# Altium PCB PowerBoard.PcbDoc
Units mm, origin at the board's own origin, x right, y up, seen from the top; angles counter-clockwise.
Board outline 100 x 50 mm, 2 copper layers (Top Layer, Bottom Layer), stack 1.536 mm thick; 47 components, 22 nets, 112 pads, 61 vias.
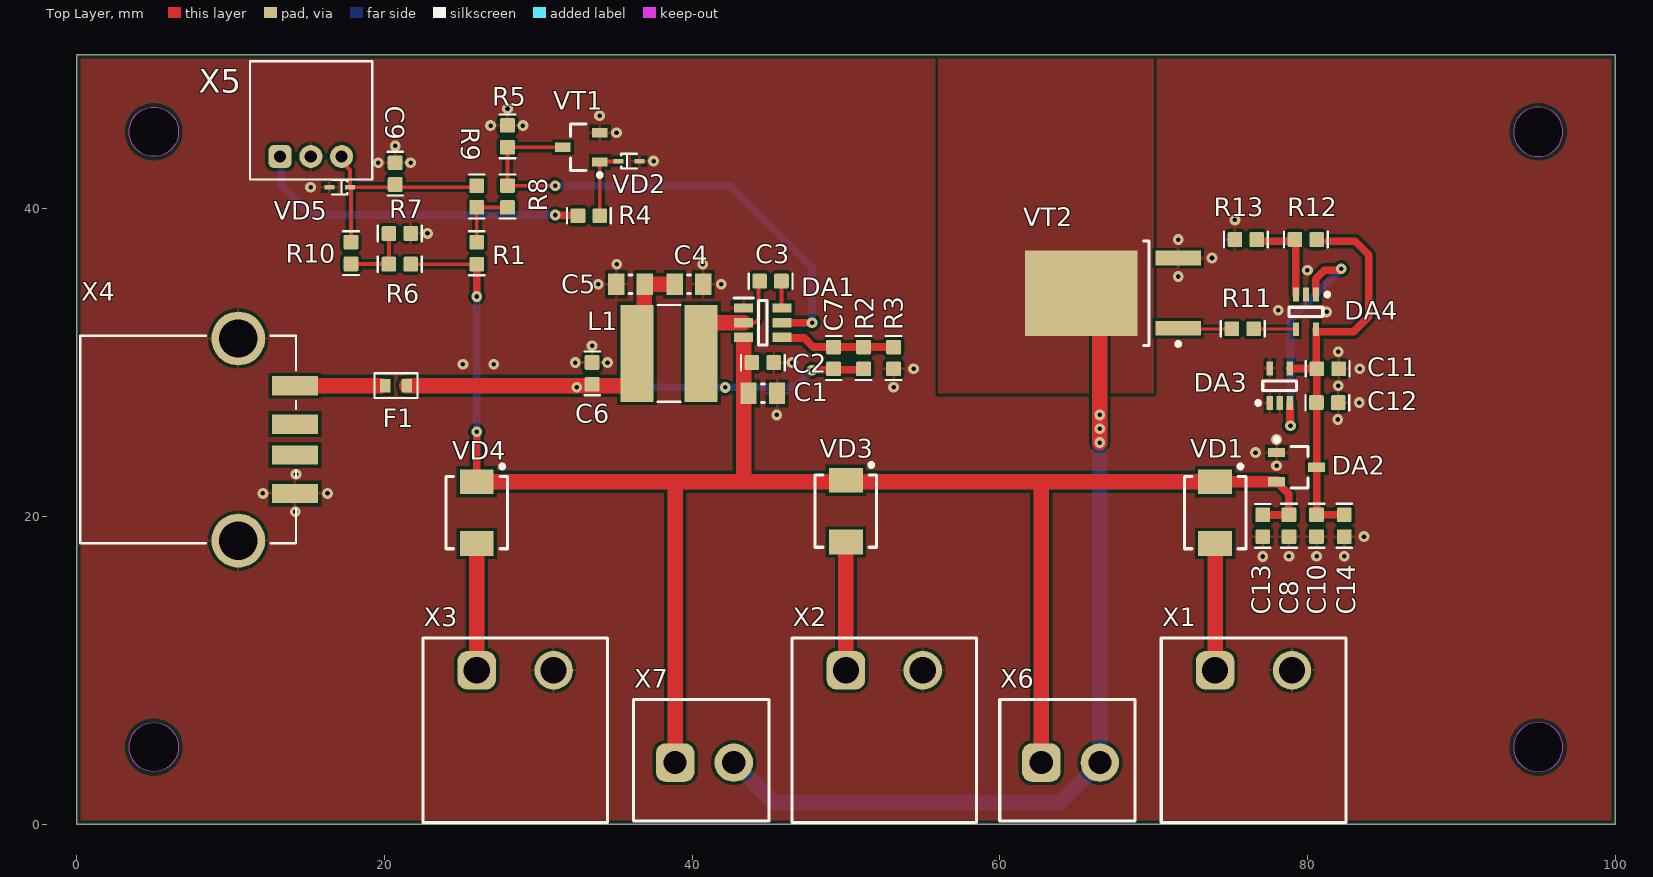
[diagram p0: Top Layer view]
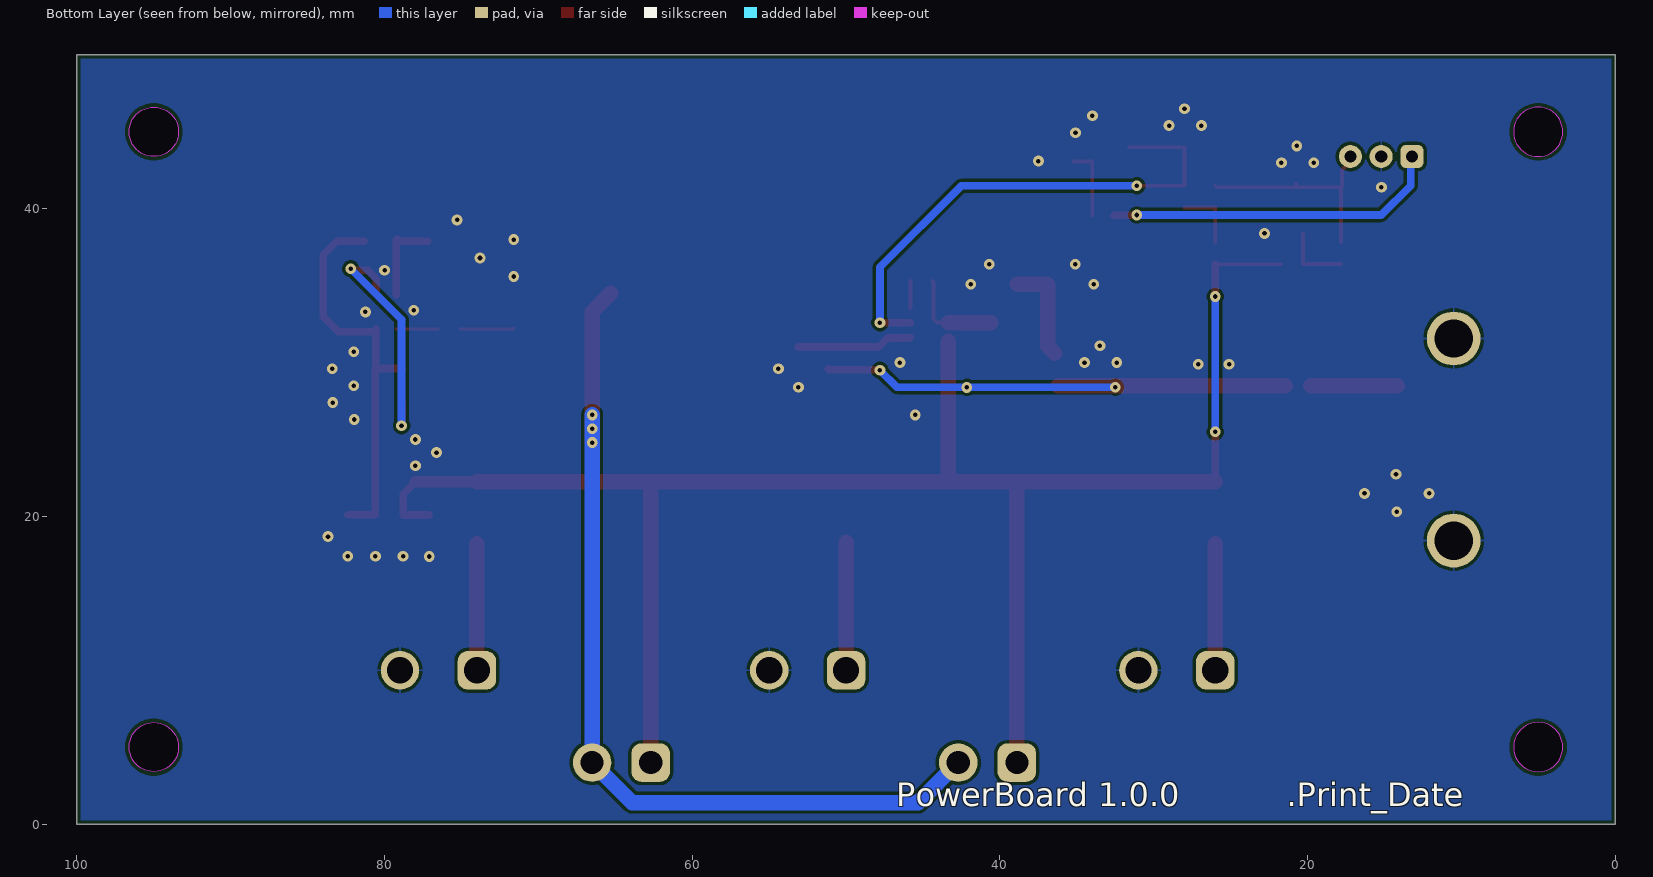
[diagram p1: Bottom Layer view, seen from below]
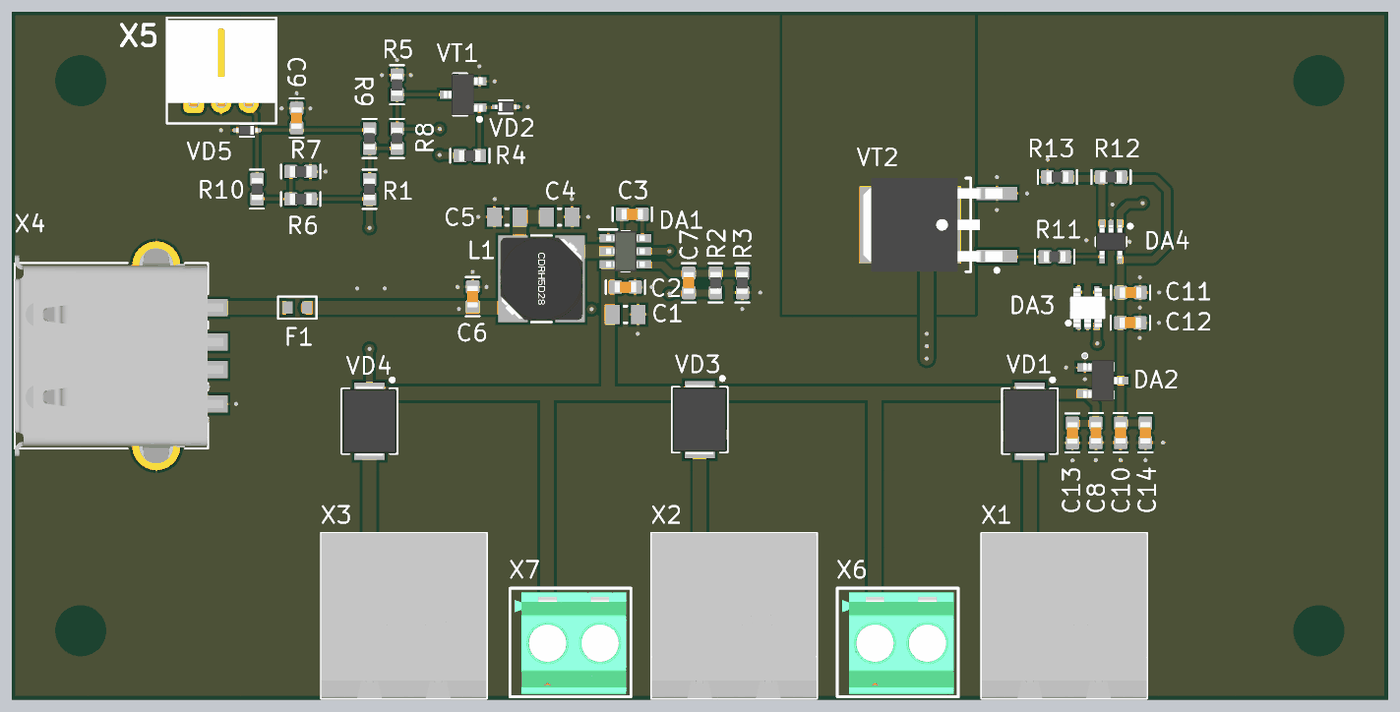
[diagram p2: 3D render of the assembled board from above, using the file's embedded part models]

## Layer stack, top to bottom
Top Solder: solder mask 0.0102, Solder Resist, Dk 3.5
Top Layer: signal copper 0.018
Dielectric 1: dielectric 1.5, FR-4, Dk 4.8
Bottom Layer: signal copper 0.018
Bottom Solder: solder mask 0.0102, Solder Resist, Dk 3.5

## Board outline
0.006,0.006 100.006,0.006 100.006,50.006 0.006,50.006
cut-out: 93.406,45.006 ccw(c95.006,45.006) 95.006,43.406 ccw(c95.006,45.006) 96.606,45.006 ccw(c95.006,45.006) 95.006,46.606 ccw(c95.006,45.006)
cut-out: 93.406,5.006 ccw(c95.006,5.006) 95.006,3.406 ccw(c95.006,5.006) 96.606,5.006 ccw(c95.006,5.006) 95.006,6.606 ccw(c95.006,5.006)
cut-out: 3.406,5.006 cw(c5.006,5.006) 5.006,6.606 cw(c5.006,5.006) 6.606,5.006 cw(c5.006,5.006) 5.006,3.406 cw(c5.006,5.006)
cut-out: 5.006,43.406 cw(c5.006,45.006) 3.406,45.006 cw(c5.006,45.006) 5.006,46.606 cw(c5.006,45.006) 6.606,45.006 cw(c5.006,45.006)

## Design rules (kind name [scope] priority, off if disabled: settings)
AcuteAngle [All] p1: minimum=3.50000000000000E+0001 checktracksonly=FALSE
BoardOutlineClearance "BoardOutlineClearance 1" [All] p1: gap=0.25 ignorepadtopadclearanceinfootprint=FALSE except(0: Arc-SplitContinuation Track-SplitContinuation SMDPad-SplitContinuation THPad-SplitContinuation Via-SplitContinuation Fill-SplitContinuation Poly-SplitContinuation Region-SplitContinuation Text-SplitContinuation) // Milling
BoardOutlineClearance "BoardOutlineClearance 2" [All] p2 off: gap=0.4 ignorepadtopadclearanceinfootprint=FALSE except(0: Arc-SplitContinuation Track-SplitContinuation SMDPad-SplitContinuation THPad-SplitContinuation Via-SplitContinuation Fill-SplitContinuation Poly-SplitContinuation Region-SplitContinuation Text-SplitContinuation) // V-Cut
Clearance "Clearance 3 Oz" [All] p1 off: gap=0.35 ignorepadtopadclearanceinfootprint=FALSE except(0.25: Arc-Hole Track-Hole SMDPad-Hole THPad-Hole Via-Hole Fill-Hole Poly-Hole Region-Hole Text-Hole)
Clearance "Clearance 2 Oz" [All] p2 off: gap=0.3 ignorepadtopadclearanceinfootprint=FALSE except(0.25: Arc-Hole Track-Hole SMDPad-Hole THPad-Hole Via-Hole Fill-Hole Poly-Hole Region-Hole Text-Hole)
Clearance "Clearance-1 1 Oz" [All] p3 off: gap=0.2 ignorepadtopadclearanceinfootprint=FALSE except(0.25: Arc-Hole Track-Hole SMDPad-Hole THPad-Hole Via-Hole Fill-Hole Poly-Hole Region-Hole Text-Hole) // Standart
Clearance "Clearance-2 1 Oz" [All] p4 off: gap=0.15 ignorepadtopadclearanceinfootprint=FALSE except(0.2: Arc-Fill Arc-Poly Track-Fill Track-Poly SMDPad-Fill SMDPad-Poly THPad-Fill THPad-Poly Via-Fill Via-Poly Fill-Fill Fill-Poly Poly-Poly; 0.25: Arc-Hole Track-Hole SMDPad-Hole THPad-Hole Via-Hole Fill-Hole Poly-Hole Region-Hole Text-Hole) // Advance
Clearance "Clearance-1 1/2 Oz" [All] p5: gap=0.125 ignorepadtopadclearanceinfootprint=FALSE except(0.2: Arc-Fill Arc-Poly Track-Fill Track-Poly SMDPad-SMDPad SMDPad-Fill SMDPad-Poly THPad-Fill THPad-Poly Via-Fill Via-Poly Fill-Fill Fill-Poly Poly-Poly Poly-Region Poly-Text; 0.25: Arc-Hole Track-Hole SMDPad-Hole THPad-Hole Via-Hole Fill-Hole Poly-Hole Region-Hole Text-Hole) // Standart
Clearance "Clearance-2 1/2 Oz" [All] p6 off: gap=0.1 ignorepadtopadclearanceinfootprint=FALSE except(0.15: Arc-Fill Arc-Poly Track-Fill Track-Poly SMDPad-SMDPad SMDPad-Fill SMDPad-Poly THPad-Fill THPad-Poly Via-Fill Via-Poly Fill-Fill Fill-Poly Poly-Poly Poly-Region Poly-Text; 0.25: Arc-Hole Track-Hole SMDPad-Hole THPad-Hole Via-Hole Fill-Hole Poly-Hole Region-Hole Text-Hole) // Advance
DiffPairsRouting "DiffPairsRouting 1 Oz" [All] p1 off: maxlimit=0.254 minlimit=0.2 mostfreqgap=0.254 toplayer_minwidth=0.2 toplayer_maxwidth=0.381 toplayer_prefwidth=0.381 bottomlayer_minwidth=0.2 bottomlayer_maxwidth=0.381 bottomlayer_prefwidth=0.381 maxuncoupledlength=12.7
DiffPairsRouting "DiffPairsRouting 1/2 Oz" [All] p2: maxlimit=0.254 minlimit=0.1 mostfreqgap=0.254 toplayer_minwidth=0.1 toplayer_maxwidth=0.381 toplayer_prefwidth=0.381 bottomlayer_minwidth=0.1 bottomlayer_maxwidth=0.381 bottomlayer_prefwidth=0.381 maxuncoupledlength=12.7
HoleSize "Minimum HoleSize" [IsPad] p1: absolutevalues=TRUE maxlimit=5.9 minlimit=0.6 maxpercent=80.000 minpercent=20.000
HoleSize "Minimum HoleSize VIA 1" [IsVia] p2: absolutevalues=TRUE maxlimit=5.9 minlimit=0.3 maxpercent=80.000 minpercent=20.000 // Standart
HoleSize "Minimum HoleSize VIA 2" [IsVia] p3 off: absolutevalues=TRUE maxlimit=5.9 minlimit=0.2 maxpercent=80.000 minpercent=20.000 // Advance
HoleToHoleClearance Hole2HoleClearance [All] p1: gap=0.25 allowstackedmicrovias=FALSE
MinimumAnnularRing "Minimum AR VIA Standart" [IsVia] p1: minimumring=0.15
MinimumAnnularRing "Minimum AR PAD Standart" [IsPAD] p2: minimumring=0.2
MinimumAnnularRing "Minimum AR VIA Advance" [IsVia] p3 off: minimumring=0.1
MinimumAnnularRing "Minimum AR PAD Advance" [IsPAD] p4 off: minimumring=0.15
MinimumSolderMaskSliver "SolderMask Bridge Standart" [All] p1: minsoldermaskwidth=0.15 // All Masks
MinimumSolderMaskSliver "SolderMask Bridge Advance" [All] p2 off: minsoldermaskwidth=0.1 // Mask LDI
PlaneClearance "PlaneClearance 3 Oz" [All] p1 off: clearance=0.35
PlaneClearance "PlaneClearance 2 Oz" [All] p2 off: clearance=0.3
PlaneClearance "PlaneClearance 1 Oz" [All] p3 off: clearance=0.2
PlaneClearance "PlaneClearance-1 1/2 Oz" [All] p4: clearance=0.2 // Standart
PlaneClearance "PlaneClearance-2 1/2 Oz" [All] p5 off: clearance=0.15 // Advance
PlaneConnect "TermalConnect 3 Oz" [All] p1 off: planeconnectstyle=Relief reliefexpansion=0.2 reliefentries=4 reliefconductorwidth=0.35 reliefairgap=0.35 // Standart
PlaneConnect "TermalConnect 2 Oz" [All] p2 off: planeconnectstyle=Relief reliefexpansion=0.2 reliefentries=4 reliefconductorwidth=0.3 reliefairgap=0.3 // Standart
PlaneConnect "TermalConnect-1 1 Oz" [All] p3 off: planeconnectstyle=Relief reliefexpansion=0.2 reliefentries=4 reliefconductorwidth=0.2 reliefairgap=0.2 // Standart
PlaneConnect "TermalConnect-2 1 Oz" [All] p4 off: pad.planeconnectstyle=Relief pad.reliefexpansion=0.15 pad.reliefentries=4 pad.reliefconductorwidth=0.2 pad.reliefairgap=0.2 via.planeconnectstyle=Direct via.reliefexpansion=0.15 via.reliefentries=4 via.reliefconductorwidth=0.15 via.reliefairgap=0.15 // Advance
PlaneConnect "TermalConnect-1 1/2 Oz" [All] p5: planeconnectstyle=Relief reliefexpansion=0.2 reliefentries=4 reliefconductorwidth=0.2 reliefairgap=0.2 // Standart
PlaneConnect "TermalConnect-2 1/2 Oz" [All] p6 off: pad.planeconnectstyle=Relief pad.reliefexpansion=0.15 pad.reliefentries=4 pad.reliefconductorwidth=0.15 pad.reliefairgap=0.15 via.planeconnectstyle=Direct via.reliefexpansion=0.15 via.reliefentries=4 via.reliefconductorwidth=0.15 via.reliefairgap=0.15 // Advance
PolygonConnect "PolygonConnect 3 Oz" [All] p1 off: thpad.connectstyle=Relief thpad.reliefconductorwidth=0.35 thpad.reliefentries=4 thpad.polygonreliefangle="90 Angle" thpad.airgapwidth=0.35 smdpad.connectstyle=Relief smdpad.reliefconductorwidth=0.35 smdpad.reliefentries=4 smdpad.polygonreliefangle="90 Angle" smdpad.airgapwidth=0.35 via.connectstyle=Direct via.reliefconductorwidth=0.254 via.reliefentries=4 via.polygonreliefangle="90 Angle" via.airgapwidth=0.254
PolygonConnect "PolygonConnect 2 Oz" [All] p2 off: thpad.connectstyle=Relief thpad.reliefconductorwidth=0.3 thpad.reliefentries=4 thpad.polygonreliefangle="90 Angle" thpad.airgapwidth=0.3 smdpad.connectstyle=Relief smdpad.reliefconductorwidth=0.3 smdpad.reliefentries=4 smdpad.polygonreliefangle="90 Angle" smdpad.airgapwidth=0.3 via.connectstyle=Direct via.reliefconductorwidth=0.254 via.reliefentries=4 via.polygonreliefangle="90 Angle" via.airgapwidth=0.254
PolygonConnect "PolygonConnect-1 1 Oz" [All] p3 off: thpad.connectstyle=Relief thpad.reliefconductorwidth=0.2 thpad.reliefentries=4 thpad.polygonreliefangle="90 Angle" thpad.airgapwidth=0.2 smdpad.connectstyle=Relief smdpad.reliefconductorwidth=0.2 smdpad.reliefentries=4 smdpad.polygonreliefangle="90 Angle" smdpad.airgapwidth=0.2 via.connectstyle=Direct via.reliefconductorwidth=0.254 via.reliefentries=4 via.polygonreliefangle="90 Angle" via.airgapwidth=0.254 // Standart
PolygonConnect "PolygonConnect-2 1 Oz" [All] p4 off: thpad.connectstyle=Relief thpad.reliefconductorwidth=0.15 thpad.reliefentries=4 thpad.polygonreliefangle="90 Angle" thpad.airgapwidth=0.15 smdpad.connectstyle=Relief smdpad.reliefconductorwidth=0.15 smdpad.reliefentries=4 smdpad.polygonreliefangle="90 Angle" smdpad.airgapwidth=0.15 via.connectstyle=Direct via.reliefconductorwidth=0.254 via.reliefentries=4 via.polygonreliefangle="90 Angle" via.airgapwidth=0.254 // Advance
PolygonConnect "PolygonConnect-1 1/2 Oz" [All] p5: thpad.connectstyle=Relief thpad.reliefconductorwidth=0.15 thpad.reliefentries=4 thpad.polygonreliefangle="90 Angle" thpad.airgapwidth=0.2 smdpad.connectstyle=Relief smdpad.reliefconductorwidth=0.2 smdpad.reliefentries=4 smdpad.polygonreliefangle="90 Angle" smdpad.airgapwidth=0.2 via.connectstyle=Direct via.reliefconductorwidth=0.254 via.reliefentries=4 via.polygonreliefangle="90 Angle" via.airgapwidth=0.254 // Standart
PolygonConnect "PolygonConnect-2 1/2 Oz" [All] p6 off: thpad.connectstyle=Relief thpad.reliefconductorwidth=0.125 thpad.reliefentries=4 thpad.polygonreliefangle="90 Angle" thpad.airgapwidth=0.15 smdpad.connectstyle=Relief smdpad.reliefconductorwidth=0.125 smdpad.reliefentries=4 smdpad.polygonreliefangle="90 Angle" smdpad.airgapwidth=0.15 via.connectstyle=Direct via.reliefconductorwidth=0.254 via.reliefentries=4 via.polygonreliefangle="90 Angle" via.airgapwidth=0.254 // Advance
RoutingCorners [All] p1 off: cornerstyle=45-Degree minsetback=2.54 maxsetback=2.54
RoutingVias [All] p1: holewidth=0.3 width=0.6 viastyle="Through Hole" minholewidth=0.2 minwidth=0.4 maxholewidth=5.9 maxwidth=6.4
SilkToSilkClearance Silk2SilkClearance [All] p1 off: silktosilkclearance=0.15
SilkToSolderMaskClearance Silk2SolderMaskClearance [IsPad] p1 off: minsilkscreentomaskgap=0.15 clearancetoexposedcopper=TRUE
SolderMaskExpansion SolderMaskExpansion-1 [All] p1: expansion=0.05 istentingtop=FALSE // Standart
SolderMaskExpansion "SolderMaskExpansion LDI" [All] p2 off: expansion=0.025 istentingtop=FALSE // Advance
UnRoutedNet [All] p1: checkbadconnections=TRUE
Width "Width 3 Oz" [All] p1 off: maxlimit=10 minlimit=0.35 preferedwidth=0.4 checkconnectedcopper=TRUE
Width "Width 2 Oz" [All] p2 off: maxlimit=10 minlimit=0.3 preferedwidth=0.35 minimp=50.000000 maximp=50.000000 favimp=50.000000 checkconnectedcopper=TRUE
Width "Width 1 Oz" [All] p3 off: maxlimit=10 minlimit=0.15 preferedwidth=0.2 checkconnectedcopper=TRUE
Width "Width 1/2 Oz" [All] p4: maxlimit=10 minlimit=0.1 preferedwidth=0.125 checkconnectedcopper=TRUE
20 further rules are at their usual default settings.

## Components (designator, comment, footprint, x,y, rotation, side; value= is the part's Value field where it differs from the comment)
C1 "4.7uF" "C0805 (2012 Metric) N" 44.6,28 r180 top
C2 "0.1uF" "C0603 (1608 Metric) N" 44.6,30 r0 top
C3 "0.1uF" "C0603 (1608 Metric) N" 45.1,35.3 r180 top
C4 "22uF" "C0805 (2012 Metric) N" 39.8,35.1 r0 top
C5 "22uF" "C0805 (2012 Metric) N" 36,35.1 r180 top
C6 "0.1uF" "C0603 (1608 Metric) N" 33.5,29.3 r270 top
C7 "68pF" "C0603 (1608 Metric) N" 49.2,30.3 r270 top
C8 "10uF" "C0603 (1608 Metric) N" 78.8,19.4 r270 top
C9 "0.1uF" "C0603 (1608 Metric) N" 20.7,42.29 r270 top
C10 "10uF" "C0603 (1608 Metric) N" 80.6,19.4 r270 top
C11 "0.1uF" "C0603 (1608 Metric) N" 81.32,29.6 r0 top
C12 "0.1uF" "C0603 (1608 Metric) N" 81.3,27.4 r0 top
C13 "0.1uF" "C0603 (1608 Metric) N" 77.1,19.39 r270 top
C14 "0.1uF" "C0603 (1608 Metric) N" 82.4,19.4 r270 top
DA1 "TPS54202DDCR" SOT95P280X110-6N 44.6,32.6 r0 top
DA2 "HT7530S" SOT23-3 79.3,23.2 r0 top
DA3 "STLM20W87F" "STLM20DD9F - duplicate" 78.2,28.5 r90 top
DA4 "RS8907XC5" SOT23-5 79.9,33.3 r270 top
F1 "1.5A" "F0603 (1608 Metric) N" 20.75,28.5 r180 top
L1 "15µH" CDRH5D28 38.5,30.6 r180 top
R1 "3.9M" "R0603 (1608 Metric) N" 26,37.11 r270 top
R2 "100k" "R0603 (1608 Metric) N" 51.15,30.3 r270 top
R3 "13.3k" "R0603 (1608 Metric) N" 53.1,30.3 r90 top
R4 "1k" "R0603 (1608 Metric) N" 33.29,39.55 r0 top
R5 "220k" "R0603 (1608 Metric) N" 28,44.71 r270 top
R6 "511k" "R0603 (1608 Metric) N" 21,36.4 r0 top
R7 "82k" "R0603 (1608 Metric) N" 21,38.4 r180 top
R8 "390k" "R0603 (1608 Metric) N" 28,40.8 r270 top
R9 "1k" "R0603 (1608 Metric) N" 26,40.8 r270 top
R10 "1k" "R0603 (1608 Metric) N" 17.823,37.123 r90 top
R11 "51" "R0603 (1608 Metric) N" 75.8,32.2 r0 top
R12 "51k" "R0603 (1608 Metric) N" 79.9,38 r0 top
R13 "100k" "R0603 (1608 Metric) N" 76,38 r0 top
VD1 "10BQ030" "DO-214AA ( SMB )" 74,20.25 r270 top
VD2 "PESD12VS1UB" SOD-523 35.9,43.1 r0 top
VD3 "10BQ030" "DO-214AA ( SMB )" 50,20.35 r270 top
VD4 "10BQ030" "DO-214AA ( SMB )" 26,20.25 r270 top
VD5 "PESD12VS1UB" SOD-523 17.09,41.4 r180 top
VT1 "WM03N32M" SOT95P245X110-3N 32.8,44 r180 top
VT2 "UMW 30N03A" TO-252 67.35,34.52 r180 top
X1 "2EDGRC-5.0-02P-14-00AH" 2EDGRC-5.0-02P-14 76.5,12.1 r90 top
X2 "2EDGRC-5.0-02P-14-00AH" 2EDGRC-5.0-02P-14 52.5,12.1 r90 top
X3 "2EDGRC-5.0-02P-14-00AH" 2EDGRC-5.0-02P-14 28.5,12.1 r90 top
X4 "1-292303-1" TE_1-292303-1 10.5,25 r270 top
X5 "S3B-PH-K-S(LF)(SN)" S3B-PH-K-S(LF)(SN) 15.215,43.4 r0 top
X6 "DG381-3.81-02P-14-00AH" DG381-3.81-02P-14-00AH 62.7,4 r90 top
X7 "DG381-3.81-02P-14-00AH" DG381-3.81-02P-14-00AH 38.9,4 r90 top

## Footprints (in the part's own frame and the unit in brackets; to place one, negate y for a bottom-side part, rotate by r counter-clockwise, add the part's x,y. Pads: shape width x height; smd on the part's side, far side on the other; paste and mask are expansions set on the pad)
2EDGRC-5.0-02P-14 [mm]
  rrect50% 2.5x2.5 hole 1.7: 1(-2.1,2.5)
  round 2.5 hole 1.7: 2(-2.1,-2.5)
  silkscreen extent -12,-6 0,6, body extent -12,-6 0,6, height 10
"C0603 (1608 Metric) N" [mm] "Capacitor, Chip; 1.60 mm L X 0.80 mm W X 0.95 mm H body"
  rrect20% 0.95x0.97 smd: 1(-0.71,0) 2(0.71,0)
  Top Layer pour cut-out: -0.2,0.5 0.2,0.5 0.2,-0.5 -0.2,-0.5
  silkscreen extent -1.43,-0.5 1.43,0.5, body extent -0.8,-0.4 0.8,0.4, height 0.95
"C0805 (2012 Metric) N" [mm] "Chip Capacitor, 2-Leads, Body 2.00x1.25mm, IPC Medium Density"
  rect 1.05x1.4 smd: 1(-0.925,0) 2(0.925,0)
  silkscreen extent -0.1,-0.6 0.1,0.6, body extent -1.05,-0.67 1.05,0.67, height 0.6
CDRH5D28 [mm]
  rect 2.15x6.3 smd: 1(-2.075,0) 2(2.075,0)
  silkscreen extent -0.75,-3.15 0.75,3.15, body extent -3,-3 3,3, height 3
DG381-3.81-02P-14-00AH [mm] "DG381-3.81-02P-14-00AH"
  rrect50% 2.5x2.5 hole 1.5: 1(0,0)
  round 2.5 hole 1.5: 2(0,-3.81)
  silkscreen extent -3.8,-6.1 4.1,2.7, body extent -3.6,-5.76 3.8,2.36, height 8.6
"DO-214AA ( SMB )" [mm]
  rect 1.6x2.2 smd: A(2.01,0) C(-2.01,0)
  silkscreen extent -3.12,-2 2.35,2, body extent -2.57,-1.97 2.57,1.97, height 2.38
"F0603 (1608 Metric) N" [mm] "Chip Resistor, 2-Leads, Body 1.60x0.80mm, IPC Medium Density"
  rect 0.7x0.9 smd: 1(-0.7,0) 2(0.7,0)
  silkscreen extent -1.4,-0.8 1.4,0.8, body extent -0.85,-0.45 0.85,0.45, height 0.4
"R0603 (1608 Metric) N" [mm] "Resistor, Chip; 1.60 mm L X 0.80 mm W X 0.95 mm H body"
  rrect20% 0.95x0.97 smd: 1(-0.71,0) 2(0.71,0)
  Top Layer pour cut-out: -0.2,0.5 0.2,0.5 0.2,-0.5 -0.2,-0.5
  silkscreen extent -1.43,-0.5 1.43,0.5, body extent -0.8,-0.4 0.8,0.4, height 0.95
S3B-PH-K-S(LF)(SN) [mm]
  rrect50% 1.5x1.5 hole 0.8: 1(-2,0)
  round 1.5 hole 0.8: 2(0,0) 3(2,0)
  silkscreen extent -3.95,-1.5 4,6.2, body extent -4,-0.25 4,6, height 4.62
SOD-523 [mm]
  rect 0.65x0.3 smd: A(0.675,0) C(-0.675,0)
  silkscreen extent -0.5,-0.48 0.5,0.48, body extent -0.8,-0.4 0.8,0.4, height 0.7
SOT23-3 [mm] "SOT23, 3-Leads, Body 2,90x2,60mm, Pitch 0,95mm, IPC Medium Density"
  rect 1.1x0.6 smd: 1(-1.3,0.95) 2(-1.3,-0.95) 3(1.3,0)
  silkscreen extent -1.42,-1.35 0.75,1.92, body extent -1.42,-1.5 1.42,1.5, height 1.3
SOT23-5 [mm] "SOT23, 5-Leads, Body 2,00x2,10mm, Pitch 0,65mm, IPC Medium Density"
  rect 0.9x0.4 smd: 1(-1.125,0.65) 2(-1.125,0) 3(-1.125,-0.65) 4(1.125,-0.65) 5(1.125,0.65)
  silkscreen extent -1.25,-1.1 0.3,1.53, body extent -1.2,-1.1 1.2,1.1, height 1
SOT95P245X110-3N [mm] "SOT23, 3-Leads, Body 2,90x2,45mm, Pitch 0,95mm, IPC Medium Density"
  rect 1x0.6 smd: D(1.2,0) G(-1.2,0.95) S(-1.2,-0.95)
  silkscreen extent -1.33,-1.5 0.7,1.92, body extent -1.42,-1.5 1.42,1.5, height 1.2
SOT95P280X110-6N [mm]
  rect 1.25x0.6 smd: 1(-1.25,0.95) 2(-1.25,0) 3(-1.25,-0.95) 4(1.25,-0.95) 5(1.25,0) 6(1.25,0.95)
  silkscreen extent -1.88,-1.45 0.28,1.6, body extent -1.4,-1.45 1.4,1.45, height 1.1
"STLM20DD9F - duplicate" [mm] "SOT23, 5-Leads, Body 2,00x2,10mm, Pitch 0,65mm, IPC Medium Density"
  rect 0.9x0.4 smd: 1(-1.125,0.65) 2(-1.125,0) 3(-1.125,-0.65) 4(1.125,-0.65) 5(1.125,0.65)
  silkscreen extent -1.25,-1.1 0.3,1.52, body extent -1.42,-1.3 1.42,1.3, height 1.2
TE_1-292303-1 [mm]
  round 3.5 hole 2.5: 0(-6.57,0) 0(6.57,0)
  rect 1.25x3 smd: 1(-3.5,3.68) 2(-1,3.68) 3(1,3.68) 4(3.5,3.68)
  silkscreen extent -6.75,-10.28 6.75,3.75, body extent -8.12,-10.28 8.12,4.88, height 7.77
TO-252 [mm] "D-PAK, 3-Pads, Body 6,25x6,76mm (max), IPC Medium Density"
  rect 7.3x5.55 smd: D(2.05,0)
  rect 2.95x0.95 smd: G(-4.25,2.28) S(-4.25,-2.28)
  silkscreen extent -4.38,-3.4 -2,3.43, body extent -4.65,-3.4 5.45,3.4, height 2.9

## Part data
C1: library part CL21A475KBQNNNE, "CAP CER 4.7UF 50V X5R 0805", Manufacturer="Samsung Electro-Mechanics", Operating Temperature="-55°C ~ 85°C", Package / Case="0805 (2012 Metric)", Ratings=-, Supplier Part Number 1=1276-1248-1-ND, Temperature Coefficient=X5R, Tolerance=±10%, Voltage - Rated=50V, @ qty=0, Applications="General Purpose", ComponentLink1Description=Datasheet, ComponentLink1URL=http://www.samsungsem.com/kr/support/product-search/mlcc/CL21A475KBQNNNE.jsp, Factory Stock=0, Failure Rate=-, Features=-, Height - Seated (Max)=-, Image=//media.digikey.com/Renders/Samsung%20Electro-Mechanics%20America/0805-(1.40)-CL-Series.jpg, Lead Spacing=-, Lead Style=-, Minimum Quantity=2000, Mounting Type="Surface Mount, MLCC", Packaging="Tape & Reel (TR)", Part Number=CL21A475KBQNNNE, Part Status=Active, Part Type=Capacitor, Points=2, Quantity Available=20000, Series=CL, Size / Dimension="0.079\" L x 0.049\" W (2.00mm x 1.25mm)", Supplier 1=Digikey, Thickness (Max)="0.055\" (1.40mm)", Unit Price (USD)=0.12360
C2 C3 C6 C9 C12: library part CL10B104KB8NNNC, "CAP CER 0.1UF 50V X7R 0603", Manufacturer="Samsung Electro-Mechanics", Operating Temperature="-55°C ~ 125°C", Package / Case="0603 (1608 Metric)", Ratings=-, Supplier Part Number 1=1276-1000-1-ND, Temperature Coefficient=X7R, Tolerance=±10%, Voltage - Rated=50V, @ qty=0, Applications="General Purpose", ComponentLink1Description=Datasheet, ComponentLink1URL=http://www.samsungsem.com/kr/support/product-search/mlcc/CL10B104KB8NNNC.jsp, Factory Stock=0, Failure Rate=-, Features=-, Height - Seated (Max)=-, Image=//media.digikey.com/Renders/Samsung%20Electro-Mechanics%20America/CL%20Series%200603(1608%20Metric)%2010.jpg, Lead Spacing=-, Lead Style=-, Minimum Quantity=4000, Mounting Type="Surface Mount, MLCC", Packaging="Tape & Reel (TR)", Part Number=CL10B104KB8NNNC, Part Status=Active, Part Type=Capacitor, Points=2, Quantity Available=0, Series=CL, Size / Dimension="0.063\" L x 0.032\" W (1.60mm x 0.80mm)", Supplier 1=Digikey, Thickness (Max)="0.035\" (0.90mm)", Unit Price (USD)=0.00627
C4 C5: library part CC0805MKX5R6BB226, "CAP CER 22UF 10V X5R 0805", Manufacturer=Yageo, Operating Temperature="-55°C ~ 85°C", Package / Case="0805 (2012 Metric)", Ratings=-, Supplier Part Number 1=311-1900-1-ND, Temperature Coefficient=X5R, Tolerance=±20%, Voltage - Rated=10V, @ qty=0, Applications="General Purpose", ComponentLink1Description=Datasheet, ComponentLink1URL=http://www.yageo.com/documents/recent/UPY-GPHC_X5R_4V-to-50V_25.pdf, Factory Stock=0, Failure Rate=-, Features=-, Height - Seated (Max)=-, Image=//media.digikey.com/Renders/Yageo%20Renders/0805%288%5E5mm%20thickness%29.jpg, Lead Spacing=-, Lead Style=-, Minimum Quantity=0, Mounting Type="Surface Mount, MLCC", Packaging="Tape & Reel (TR)", Part Number=CC0805MKX5R6BB226, Part Status=Active, Part Type=Capacitor, Points=2, Quantity Available=0, Series=CC, Size / Dimension="0.079\" L x 0.049\" W (2.00mm x 1.25mm)", Supplier 1=Digikey, Thickness (Max)="0.057\" (1.45mm)", Unit Price (USD)=Active
C7: library part CC0603JRNPO9BN680, "CAP CER 68PF 50V C0G/NPO 0603", Manufacturer=Yageo, Operating Temperature="-55°C ~ 125°C", Package / Case="0603 (1608 Metric)", Ratings=-, Supplier Part Number 1=311-1067-1-ND, Temperature Coefficient="C0G, NP0", Tolerance=±5%, Voltage - Rated=50V, @ qty=0, Applications="General Purpose", ComponentLink1Description=Datasheet, ComponentLink1URL=http://www.yageo.com/documents/recent/UPY-GP_NP0_16V-to-50V_16.pdf, Factory Stock=0, Failure Rate=-, Features=-, Height - Seated (Max)=-, Image=//media.digikey.com/Renders/Yageo%20Renders/0603%289mmthickness%29.jpg, Lead Spacing=-, Lead Style=-, Minimum Quantity=4000, Mounting Type="Surface Mount, MLCC", Packaging="Tape & Reel (TR)", Part Number=CC0603JRNPO9BN680, Part Status=Active, Part Type=Capacitor, Points=2, Quantity Available=40000, Series=CC, Size / Dimension="0.063\" L x 0.032\" W (1.60mm x 0.80mm)", Supplier 1=Digikey, Thickness (Max)="0.035\" (0.90mm)", Unit Price (USD)=0.01379
C8 C10: library part CC0603JRNPO9BN680, "CAP CER 10uF 6.3V C0G/NPO 0603", Manufacturer=Yageo, Operating Temperature="-55°C ~ 125°C", Package / Case="0603 (1608 Metric)", Part Number=CC0603MRX6S5BB106, Ratings=-, Supplier Part Number 1=311-1067-1-ND, Temperature Coefficient="C0G, NP0", Tolerance=±5%, Voltage - Rated=50V, @ qty=0, Applications="General Purpose", ComponentLink1Description=Datasheet, ComponentLink1URL=http://www.yageo.com/documents/recent/UPY-GP_NP0_16V-to-50V_16.pdf, Factory Stock=0, Failure Rate=-, Features=-, Height - Seated (Max)=-, Image=//media.digikey.com/Renders/Yageo%20Renders/0603%289mmthickness%29.jpg, Lead Spacing=-, Lead Style=-, Minimum Quantity=4000, Mounting Type="Surface Mount, MLCC", Packaging="Tape & Reel (TR)", Part Status=Active, Part Type=Capacitor, Points=2, Quantity Available=40000, Series=CC, Size / Dimension="0.063\" L x 0.032\" W (1.60mm x 0.80mm)", Supplier 1=Digikey, Thickness (Max)="0.035\" (0.90mm)", Unit Price (USD)=0.01379
C11 C13 C14: library part CC0603JRNPO9BN680, "CAP CER 0.1uF 50V C0G/NPO 0603", Manufacturer=Yageo, Operating Temperature="-55°C ~ 125°C", Package / Case="0603 (1608 Metric)", Part Number=CC0603JRX7R9BB104, Ratings=-, Supplier Part Number 1=311-1067-1-ND, Temperature Coefficient="C0G, NP0", Tolerance=±5%, Voltage - Rated=50V, @ qty=0, Applications="General Purpose", ComponentLink1Description=Datasheet, ComponentLink1URL=http://www.yageo.com/documents/recent/UPY-GP_NP0_16V-to-50V_16.pdf, Factory Stock=0, Failure Rate=-, Features=-, Height - Seated (Max)=-, Image=//media.digikey.com/Renders/Yageo%20Renders/0603%289mmthickness%29.jpg, Lead Spacing=-, Lead Style=-, Minimum Quantity=4000, Mounting Type="Surface Mount, MLCC", Packaging="Tape & Reel (TR)", Part Status=Active, Part Type=Capacitor, Points=2, Quantity Available=40000, Series=CC, Size / Dimension="0.063\" L x 0.032\" W (1.60mm x 0.80mm)", Supplier 1=Digikey, Thickness (Max)="0.035\" (0.90mm)", Unit Price (USD)=0.01379
DA1: library part TPS54202, "Power Supply", Manufacturer_Name="Texas Instruments", Mouser Part Number=595-TPS54202DDCR, Arrow Part Number=TPS54202DDCR, Arrow Price/Stock=https://www.arrow.com/en/products/tps54202ddcr/texas-instruments?region=nac, ComponentLink1Description=Datasheet, ComponentLink1URL=https://static.chipdip.ru/lib/513/DOC010513657.pdf, Datasheet Link=http://www.ti.com/lit/gpn/tps54202, Height=1.1mm, Mouser Price/Stock=https://www.mouser.co.uk/ProductDetail/Texas-Instruments/TPS54202DDCR?qs=uP22XH7NdCsJtN%2Fq54jCtQ%3D%3D, Part Number=TPS54202DDCR
DA2: library part "UMW HT7530S", "Power Supply", Part Number=HT7530S
DA3: library part STLM20DD9F, "Ultra-low current 2.4 V precision analog temperature sensor", ComponentLink1Description=https://www.compel.ru/item-pdf/a7e49e4dedba0033f1ae17c65d4c1409/pn/st~stlm20dd9f.pdf, ComponentLink1URL=https://www.compel.ru/item-pdf/a7e49e4dedba0033f1ae17c65d4c1409/pn/st~stlm20dd9f.pdf, Part Number=STLM20W87F
DA4: "Nano-Power, CMOS Input, RRIO, / Push-Pull Output Comparator", ComponentLink1Description=https://data.electronshik.ru/z/Datasheet/R/RS8907.pdf, ComponentLink1URL=https://data.electronshik.ru/z/Datasheet/R/RS8907.pdf, Part Number=RS8907XC5
F1: library part 0603L075SLYR, "PTC RESET FUSE 6V 750MA 0603", Current - Hold (Ih) (Max)=750mA, Current - Max=50A, Manufacturer="Littelfuse Inc.", Operating Temperature="-40°C ~ 85°C", Package / Case="0603 (1608 Metric), Concave", Ratings=-, Resistance - Initial (Ri) (Min)="20 mOhms", Resistance - Post Trip (R1) (Max)="165 mOhms", Supplier Part Number 1=F5777CT-ND, Voltage - Max=6V, @ qty=0, ComponentLink1Description=Datasheet, ComponentLink1URL=http://www.littelfuse.com/~/media/electronics/datasheets/resettable_ptcs/littelfuse_ptc_lorho_datasheet.pdf.pdf, Current - Trip (It)=1.5A, Factory Stock=0, Height - Seated (Max)=-, Image=//media.digikey.com/Renders/Littelfuse%20Renders/Poly-Fuse%200603%20(1608%20Metric)%20Concave.jpg, Lead Spacing=-, Minimum Quantity=1, Mounting Type="Surface Mount", Packaging="Cut Tape (CT)", Part Number=0603L075SLYR, Part Status=Active, Quantity Available=15808, Resistance - 25°C (Typ)=-, Series="POLY-FUSE®, LoRho", Size / Dimension="0.063\" L x 0.032\" W (1.60mm x 0.80mm)", Supplier 1=Digikey, Thickness (Max)="0.030\" (0.75mm)", Time to Trip=200ms, Type=Polymeric, Unit Price (USD)=1.91000
L1: library part CDRH5D28NP-150NC, "FIXED IND 15UH 1.1A 103 MOHM SMD", Current - Saturation=-, Current Rating=1.1A, DC Resistance (DCR)="103 mOhm Max", Frequency - Test=100kHz, Manufacturer="Sumida America Components Inc.", Operating Temperature="-40°C ~ 100°C", Package / Case=Nonstandard, Supplier Part Number 1=308-2195-2-ND, Tolerance=±30%, ComponentLink1Description=Datasheet, ComponentLink1URL=http://products.sumida.com/products/pdf/CDRH5D28.pdf, Frequency - Self Resonant=-, Height - Seated (Max)="0.118\" (3.00mm)", Image=//media.digikey.com/photos/Sumida%20Photos/CDRH5D%20SERIES.jpg, Material - Core=Ferrite, Mounting Type="Surface Mount", Part Number=CDRH5D28NP-150NC, Part Status=Active, Points=2, Q @ Freq=-, Ratings=-, Shielding=Shielded, Size / Dimension="0.224\" L x 0.224\" W (5.70mm x 5.70mm)", Supplier Device Package=-, Type=-, Unit Price (USD)=0.28900
R1: library part RC0603FR-07511KL, "RES SMD 511K OHM 1% 1/10W 0603", Manufacturer=Yageo, Operating Temperature="-55°C ~ 155°C", Package / Case="0603 (1608 Metric)", Part Number=RC0603FR-073M9L, Power (Watts)="0.1W, 1/10W", Supplier Device Package=0603, Supplier Part Number 1=311-511KHRCT-ND, Temperature Coefficient=±100ppm/°C, Tolerance=±1%, ValueGOST=511кОм, ComponentLink1Description=Datasheet, ComponentLink1URL=http://www.yageo.com/documents/recent/PYu-RC_Grou, Composition="Thick Film", Features="Moisture Resistant", Height - Seated (Max)="0.022\" (0.55mm)", Image=//media.digikey.com/Renders/Yageo%20Renders/0603-(1608-Metric).jpg, Part Status=Active, Part Type=Resistor, Points=2, Series=RC, Size / Dimension="0.063\" L x 0.031\" W (1.60mm x 0.80mm)", Supplier 1=Digikey, Unit Price (USD)=0.10000
R2 R13: library part RC0603FR-07100KL, "RES SMD 100K OHM 1% 1/10W 0603", Manufacturer=Yageo, Operating Temperature="-55°C ~ 155°C", Package / Case="0603 (1608 Metric)", Power (Watts)="0.1W, 1/10W", Supplier Device Package=0603, Supplier Part Number 1=311-100KHRCT-ND, Temperature Coefficient=±100ppm/°C, Tolerance=±1%, ValueGOST=100кОм, ComponentLink1Description=Datasheet, ComponentLink1URL=http://www.yageo.com/documents/recent/PYu-RC_Grou, Composition="Thick Film", Features="Moisture Resistant", Height - Seated (Max)="0.022\" (0.55mm)", Image=//media.digikey.com/Renders/Yageo%20Renders/0603-(1608-Metric).jpg, Part Number=RC0603FR-07100KL, Part Status=Active, Part Type=Resistor, Points=2, Series=RC, Size / Dimension="0.063\" L x 0.031\" W (1.60mm x 0.80mm)", Supplier 1=Digikey, Unit Price (USD)=0.10000
R3: library part RC0603FR-0713K3L, "RES SMD 13.3K OHM 1% 1/10W 0603", Manufacturer=Yageo, Operating Temperature="-55°C ~ 155°C", Package / Case="0603 (1608 Metric)", Power (Watts)="0.1W, 1/10W", Supplier Device Package=0603, Supplier Part Number 1=311-13.3KHRCT-ND, Temperature Coefficient=±100ppm/°C, Tolerance=±1%, ValueGOST=13.3кОм, ComponentLink1Description=Datasheet, ComponentLink1URL=http://www.yageo.com/documents/recent/PYu-RC_Grou, Composition="Thick Film", Features="Moisture Resistant", Height - Seated (Max)="0.022\" (0.55mm)", Image=//media.digikey.com/Renders/Yageo%20Renders/0603-(1608-Metric).jpg, Part Number=RC0603FR-0713K3L, Part Status=Active, Part Type=Resistor, Points=2, Series=RC, Size / Dimension="0.063\" L x 0.031\" W (1.60mm x 0.80mm)", Supplier 1=Digikey, Unit Price (USD)=0.10000
R4 R9 R10: library part RC0603FR-071KL, "RES SMD 1K OHM 1% 1/10W 0603", Manufacturer=Yageo, Operating Temperature="-55°C ~ 155°C", Package / Case="0603 (1608 Metric)", Power (Watts)="0.1W, 1/10W", Supplier Device Package=0603, Supplier Part Number 1=311-1.00KHRCT-ND, Temperature Coefficient=±100ppm/°C, Tolerance=±1%, ValueGOST=1кОм, ComponentLink1Description=Datasheet, ComponentLink1URL=http://www.yageo.com/documents/recent/PYu-RC_Grou, Composition="Thick Film", Features="Moisture Resistant", Height - Seated (Max)="0.022\" (0.55mm)", Image=//media.digikey.com/Renders/Yageo%20Renders/0603-(1608-Metric).jpg, Part Number=RC0603FR-071KL, Part Status=Active, Part Type=Resistor, Points=2, Series=RC, Size / Dimension="0.063\" L x 0.031\" W (1.60mm x 0.80mm)", Supplier 1=Digikey, Unit Price (USD)=0.10000
R5: library part RC0603FR-07100KL, "RES SMD 100K OHM 1% 1/10W 0603", Manufacturer=Yageo, Operating Temperature="-55°C ~ 155°C", Package / Case="0603 (1608 Metric)", Part Number=RC0603FR-07220KL, Power (Watts)="0.1W, 1/10W", Supplier Device Package=0603, Supplier Part Number 1=311-100KHRCT-ND, Temperature Coefficient=±100ppm/°C, Tolerance=±1%, ValueGOST=100кОм, ComponentLink1Description=Datasheet, ComponentLink1URL=http://www.yageo.com/documents/recent/PYu-RC_Grou, Composition="Thick Film", Features="Moisture Resistant", Height - Seated (Max)="0.022\" (0.55mm)", Image=//media.digikey.com/Renders/Yageo%20Renders/0603-(1608-Metric).jpg, Part Status=Active, Part Type=Resistor, Points=2, Series=RC, Size / Dimension="0.063\" L x 0.031\" W (1.60mm x 0.80mm)", Supplier 1=Digikey, Unit Price (USD)=0.10000
R6: library part RC0603FR-07511KL, "RES SMD 511K OHM 1% 1/10W 0603", Manufacturer=Yageo, Operating Temperature="-55°C ~ 155°C", Package / Case="0603 (1608 Metric)", Power (Watts)="0.1W, 1/10W", Supplier Device Package=0603, Supplier Part Number 1=311-511KHRCT-ND, Temperature Coefficient=±100ppm/°C, Tolerance=±1%, ValueGOST=511кОм, ComponentLink1Description=Datasheet, ComponentLink1URL=http://www.yageo.com/documents/recent/PYu-RC_Grou, Composition="Thick Film", Features="Moisture Resistant", Height - Seated (Max)="0.022\" (0.55mm)", Image=//media.digikey.com/Renders/Yageo%20Renders/0603-(1608-Metric).jpg, Part Number=RC0603FR-07511KL, Part Status=Active, Part Type=Resistor, Points=2, Series=RC, Size / Dimension="0.063\" L x 0.031\" W (1.60mm x 0.80mm)", Supplier 1=Digikey, Unit Price (USD)=0.10000
R7: library part RC0603FR-07100KL, "RES SMD 100K OHM 1% 1/10W 0603", Manufacturer=Yageo, Operating Temperature="-55°C ~ 155°C", Package / Case="0603 (1608 Metric)", Part Number=RC0603FR-0782KL, Power (Watts)="0.1W, 1/10W", Supplier Device Package=0603, Supplier Part Number 1=311-100KHRCT-ND, Temperature Coefficient=±100ppm/°C, Tolerance=±1%, ValueGOST=100кОм, ComponentLink1Description=Datasheet, ComponentLink1URL=http://www.yageo.com/documents/recent/PYu-RC_Grou, Composition="Thick Film", Features="Moisture Resistant", Height - Seated (Max)="0.022\" (0.55mm)", Image=//media.digikey.com/Renders/Yageo%20Renders/0603-(1608-Metric).jpg, Part Status=Active, Part Type=Resistor, Points=2, Series=RC, Size / Dimension="0.063\" L x 0.031\" W (1.60mm x 0.80mm)", Supplier 1=Digikey, Unit Price (USD)=0.10000
R8: library part RC0603FR-07100KL, "RES SMD 100K OHM 1% 1/10W 0603", Manufacturer=Yageo, Operating Temperature="-55°C ~ 155°C", Package / Case="0603 (1608 Metric)", Part Number=RC0603FR-07390KL, Power (Watts)="0.1W, 1/10W", Supplier Device Package=0603, Supplier Part Number 1=311-100KHRCT-ND, Temperature Coefficient=±100ppm/°C, Tolerance=±1%, ValueGOST=100кОм, ComponentLink1Description=Datasheet, ComponentLink1URL=http://www.yageo.com/documents/recent/PYu-RC_Grou, Composition="Thick Film", Features="Moisture Resistant", Height - Seated (Max)="0.022\" (0.55mm)", Image=//media.digikey.com/Renders/Yageo%20Renders/0603-(1608-Metric).jpg, Part Status=Active, Part Type=Resistor, Points=2, Series=RC, Size / Dimension="0.063\" L x 0.031\" W (1.60mm x 0.80mm)", Supplier 1=Digikey, Unit Price (USD)=0.10000
R11: library part RC0603FR-0751RL, "RES SMD 51 OHM 1% 1/10W 0603", Manufacturer=Yageo, Operating Temperature="-55°C ~ 155°C", Package / Case="0603 (1608 Metric)", Power (Watts)="0.1W, 1/10W", Supplier Device Package=0603, Supplier Part Number 1=311-51.0HRCT-ND, Temperature Coefficient=±100ppm/°C, Tolerance=±1%, ComponentLink1Description=Datasheet, ComponentLink1URL=http://www.yageo.com/documents/recent/PYu-RC_Grou, Composition="Thick Film", Features="Moisture Resistant", Height - Seated (Max)="0.022\" (0.55mm)", Image=//media.digikey.com/Renders/Yageo%20Renders/0603-(1608-Metric).jpg, Part Number=RC0603FR-0751RL, Part Status=Active, Part Type=Resistor, Points=2, Series=RC, Size / Dimension="0.063\" L x 0.031\" W (1.60mm x 0.80mm)", Supplier 1=Digikey, Unit Price (USD)=0.10000, ValueGOST=51
R12: library part RC0603FR-071KL, "RES SMD 1K OHM 1% 1/10W 0603", Manufacturer=Yageo, Operating Temperature="-55°C ~ 155°C", Package / Case="0603 (1608 Metric)", Part Number=RC0603FR-0751KL, Power (Watts)="0.1W, 1/10W", Supplier Device Package=0603, Supplier Part Number 1=311-1.00KHRCT-ND, Temperature Coefficient=±100ppm/°C, Tolerance=±1%, ValueGOST=1кОм, ComponentLink1Description=Datasheet, ComponentLink1URL=http://www.yageo.com/documents/recent/PYu-RC_Grou, Composition="Thick Film", Features="Moisture Resistant", Height - Seated (Max)="0.022\" (0.55mm)", Image=//media.digikey.com/Renders/Yageo%20Renders/0603-(1608-Metric).jpg, Part Status=Active, Part Type=Resistor, Points=2, Series=RC, Size / Dimension="0.063\" L x 0.031\" W (1.60mm x 0.80mm)", Supplier 1=Digikey, Unit Price (USD)=0.10000
VD1 VD3 VD4: "DIODE SCHOTTKY 30V 1A SMB", Capacitance @ Vr, F=-, Current - Average Rectified (Io)=1A, Current - Reverse Leakage @ Vr="500µA @ 30V", Manufacturer="Vishay Semiconductor Diodes Division", Operating Temperature - Junction="-55°C ~ 150°C", Package / Case="DO-214AA, SMB", Supplier Device Package=SMB, Supplier Part Number 1=10BQ030-ND, Voltage - DC Reverse (Vr) (Max)=30V, Voltage - Forward (Vf) (Max) @ If="420mV @ 1A", ComponentLink1Description=Datasheet, ComponentLink1URL=//media.digikey.com/pdf/Data%20Sheets/Vishay%20Semiconductors/VS-10BQ030PbF.pdf, Diode Type=Schottky, Mounting Type="Surface Mount", Part Number=10BQ030, Reverse Recovery Time (trr)=-, Series=-, Speed="Fast Recovery =< 500ns, > 200mA (Io)", Supplier 1=Digikey, Unit Price (USD)=Obsolete
VD2 VD5: "ESD protection diodes", Current - Peak Pulse (10/1000µs)=18A, Manufacturer=Nexperia, Power - Peak Pulse=330, Power Line Protection=Yes, Voltage - Breakdown (Min)=5.2, Voltage - Clamping (Max) @ Ipp=6.0, Voltage - Reverse Standoff (Typ)=3.3, Applications="General Purpose", Bidirectional Channels=0, ComponentLink1Description=Datasheet, ComponentLink1URL=https://static.chipdip.ru/lib/010/DOC013010914.pdf, ComponentLink10Description="Local Supplier", Part Number=PESD12VS1UB, Part Status=Active, Points=0, Series=PESDxS1UB, Supplier 1=ChipDip, Supplier Part Number 1=PESD12VS1UB, Unidirectional Channels=1
VT1: "N-Channel MOSFET", Current - Continuous Drain (Id) @ 25°C=3.2A, Drain to Source Voltage (Vdss)=30V, Drive Voltage (Max Rds On,  Min Rds On)=4.5V, Manufacturer=way-on, ComponentLink1Description=Datasheet, ComponentLink1URL=https://datasheet.lcsc.com/lcsc/2206101730_Wayon-WM03N32M_C3030969.pdf, ComponentLink2Description="Local Supplier", ComponentLink2URL=https://www.electronshik.ru/item/WAYON/WM03N32M, FET Type=N-Channel, Part Number=WM03N32M, Supplier 1=electronshik.ru, Vgs(th) (Max) @ Id=1.5
VT2: "30V N-Channel Power", ComponentLink1Description=https://static.chipdip.ru/lib/039/DOC013039432.pdf, ComponentLink1URL=https://static.chipdip.ru/lib/039/DOC013039432.pdf, Part Number="UMW 30N03A"
X1 X2 X3: "TERM BLOCK HDR 2POS 90DEG 5MM", Color=Green, Current - IEC=15A, Current - UL=10A, Manufacturer=Degson, Operating Temperature="-40°C ~ 105°C", Voltage - IEC=300V, ComponentLink1Description="Product Page", ComponentLink1URL=https://ru.degson.com/content/details_552_1153432.html?lang=ru, Header Orientation="90°, Right Angle90°, Right Angle", Mounting Type="Through Hole", Number of Levels=1, Number of Positions=2, Part Number=2EDGRC-5.0-02P-14-00AH, Part Status=Active, Pitch="0.197\" (5.00mm)", Positions Per Level=2, Series=2EDGRC, Termination Style=Solder, Voltage - UL=300V
X4: "USB A R/A RCPT ASSY SMT", Current Rating="1A per Contact", Manufacturer="TE Connectivity AMP Connectors", Operating Temperature="-55°C ~ 85°C", Supplier Part Number 1=A127890-ND, Voltage - Rated=30VAC, ComponentLink1Description=Datasheet, ComponentLink1URL=http://www.te.com/commerce/DocumentDelivery/DDEController?Action=srchrtrv&DocNm=292303&DocType=Customer+Drawing&DocLang=English, Connector Type="USB - A", Features="Board Lock", Gender=Receptacle, Image=-, Ingress Protection=-, Mating Cycles=1500, Mounting Feature=Horizontal, Mounting Type="Surface Mount, Right Angle; Through Hole", Number of Contacts=4, Number of Ports=1, Part Number=1-292303-1, Part Status=Active, Series=-, Shielding=Shielded, Specifications="USB 2.0", Supplier 1=Digikey, Termination=Solder, Unit Price (USD)=2.23000
X5: "CONN HEADER SMD R/A 3POS 2MM", ComponentLink1Description=https://www.jst-mfg.com/product/pdf/eng/ePH.pdf, ComponentLink1URL=https://www.jst-mfg.com/product/pdf/eng/ePH.pdf, Part Number=S3B-PH-K-S(LF)(SN)
X6 X7: Part Number=DG381-3.81-02P-14-00AH

## Via types
v1: diameter 0.7, hole 0.3, Top Layer to Bottom Layer, tented both sides, 61 vias

## Nets (pads, with @x,y where several pads share a name; then routed paths per layer and width w, separated by ;. In a path a pad name is that pad's centre, name@x,y a point inside that pad or via, vN(x,y) a via of type N, cw(c..) or ccw(c..) an arc to the next point about the centre after c; other vN are vias at no path point)
+5: C4.1 C5.1 C6.2 C7.2 F1.1 L1.2 R2.2 | length 40.3
  Top Layer w0.5: L1.2@36.2,28.425 L1.2@36.234,28.391 ; v1(47.8,29.5) 47.845,29.545 51.105,29.545 R2.2
  Top Layer w1: F1.1 L1.2@36.2,28.5 ; L1.2 36.9,31.075 36.9,35.075 C5.1 ; C5.1@37.2,35.075 37.225,35.1 C4.1
  Bottom Layer w0.5: v1(32.5,28.4) 32.509,28.391 v1(42.15,28.391) 46.691,28.391 v1(47.8,29.5)
GND: C1.1 C2.2 C4.2 C5.2 C6.1 C8.2 C9.1 C10.2 C11.2 C12.2 C13.2 C14.2 DA1.1 DA2.1 DA3.1 DA3.2 DA3.5 DA4.2 R3.1 R5.1 R7.1 R13.1 VD2.A VD5.A VT1.S VT2.S X1.2 X2.2 X3.2 X4.0 X4.4 X5.2
  other v1: 77.1,17.4 78.8,17.41 80.6,17.41 82.4,17.41 83.68,18.69 14.2,20.3 12.1,21.5 16.3,21.5 14.25,22.75 78,23.3 76.63,24.15 78,25 81.98,26.3 45.5,26.6 83.38,27.4 53.1,28.4 82,28.5 54.4,29.6 83.4,29.6 25.1,29.9 27.1,29.9 32.4,30 34.5,30 46.5,30 82,30.7 33.5,31.1 81.25,33.3 78.1,33.4 33.9,35.1 41.9,35.1 71.6,35.6 80,36 35.1,36.4 40.7,36.4 73.8,36.8 71.6,38 22.8,38.4 75.29,39.28 15.2,41.4 19.6,42.99 21.7,42.99 37.5,43.1 20.7,44.09 35.09,44.95 26.9,45.41 29,45.41 33.99,46.05 28,46.51
NetC3_1: C3.1 DA1.6 | length 1.8
  Top Layer w0.25: C3.1 45.81,33.59 DA1.6
NetC3_2: C3.2 DA1.2 L1.1 | length 6.3
  Top Layer w0.25: DA1.2 44.1,32.6 44.325,32.825 44.325,35.235 C3.2
  Top Layer w1: L1.1@40.6,32.6 DA1.2
NetC7_1: C7.1 DA1.4 R2.1 R3.2 | length 7.5
  Top Layer w0.5: DA1.4 45.9,31.6 47.3,31.6 47.89,31.01 C7.1 R2.1 R3.2
NetDA1_5: DA1.5 R5.2 R8.1 VT1.D | length 33.6
  Top Layer w0.25: v1(31.1,41.5) 28.01,41.5 R8.1 R5.2 VT1.D
  Top Layer w0.5: DA1.5 v1(47.8,32.6)
  Bottom Layer w0.5: v1(31.1,41.5) 42.5,41.5 47.8,36.2 v1(47.8,32.6)
NetDA3_3: DA3.3 DA4.1 | length 16
  Top Layer w0.5: DA3.3@78.875,27.35 78.875,25.925 v1(78.9,25.9) ; DA4.1 80.55,35.45 81.104,36.004 82.104,36.004 v1(82.2,36.1)
  Bottom Layer w0.5: v1(78.9,25.9) 78.9,32.8 v1(82.2,36.1)
NetDA4_3: DA4.3 R12.1 R13.2 | length 5.4
  Top Layer w0.5: 77.21,37.9 R12.1@79,37.9 ; R12.1 79.25,37.94 DA4.3
NetF1_2: F1.2 X4.1 | length 5.6
  Top Layer w1: X4.1 F1.2@19.8,28.5
NetR1_1: R1.1 R8.2 R9.2 | length 4.3
  Top Layer w0.25: R1.1 R9.2 R8.2
NetR4_2: R4.2 VD2.C VT1.G | length 4.7
  Top Layer w0.25: R4.2 VT1.G 34.025,43.075 35.2,43.075 VD2.C
NetR6_1: R6.1 R7.2 R10.1 | length 4.5
  Top Layer w0.25: R10.1 17.824,36.412 20.278,36.412 R6.1 R7.2
NetR11_1: R11.1 VT2.G | length 3.5
  Top Layer w0.2: VT2.G 71.64,32.2 R11.1
NetVD1_A: VD1.A X1.1 | length 8.2
  Top Layer w1: X1.1 VD1.A
NetVD3_A: VD3.A X2.1 | length 8.2
  Top Layer w1: X2.1@50,10.1 VD3.A@50,18.33
NetVD4_A: VD4.A X3.1 | length 8.2
  Top Layer w1: X3.1 VD4.A@26,18.23
NetVT2_D: VT2.D X6.2 X7.2 | length 58.8
  Top Layer w1: VT2.D 66.5,33.32 v1(66.5,26.6) v1(66.5,25.7) v1(66.5,24.8)
  Bottom Layer w1: X7.2 45.31,1.4 63.91,1.4 X6.2 v1@66.51,26.6
POWER_EN: R4.1 X5.1 | length 22
  Top Layer w0.5: v1(31.1,39.6) 31.125,39.575 32.555,39.575 R4.1
  Bottom Layer w0.5: X5.1@13.29,43.4 13.29,41.51 15.2,39.6 v1(31.1,39.6)
VACC: C9.2 R9.1 R10.2 VD5.C X5.3 | length 14.2
  Top Layer w0.25: X5.3 17.215,43.062 17.765,42.512 VD5.C VD5.C@17.798,41.4 ; X5.3@17.765,43.365 X5.3@17.8,43.4 ; R10.2 17.823,41.375 VD5.C@17.798,41.4 ; C9.2 C9.2@20.75,41.63 ; R9.1 25.89,41.4 VD5.C@17.798,41.4
VBAT: C1.2 C2.1 C8.1 C13.1 DA1.3 DA2.2 R1.2 R6.2 VD1.C VD3.C VD4.C X6.1 X7.1 | length 120.3
  Top Layer w0.25: R6.2 R1.2
  Top Layer w0.5: VD4.C v1(26,25.5) ; v1(26,34.3) R1.2 ; C13.1 78.79,20.1 78.79,21.46 78.075,22.175 78.075,22.2 DA2.2
  Top Layer w0.75: VD1.C 77.89,22.26 DA2.2
  Top Layer w1: VD4.C 38.9,22.26 ; X7.1 38.9,22.26 ; DA1.3@43.35,31.4 43.35,22.26 ; X6.1 62.7,22.26 ; VD1.C 62.7,22.26 ; 38.9,22.26 43.35,22.26 ; 43.35,22.26 62.7,22.26
  Bottom Layer w0.5: v1(26,25.5) v1(26,34.3)
VCC: C10.1 C11.1 C12.1 C14.1 DA2.3 DA3.4 DA4.5 R12.2 | length 26.5
  Top Layer w0.5: DA3.4 78.863,29.612 C11.1@80.598,29.612 ; DA4.5 80.55,32.05 DA4.5@80.58,32.02 ; 81.32,37.9 83.1,37.9 84,37 84,33 83,32 80.6,32 DA4.5@80.58,32.02 ; C14.1 C10.1 DA2.3 80.605,23.205 80.605,29.595 C11.1 C11.1@80.598,29.612 ; DA4.5@80.58,32.02 80.58,29.63 C11.1@80.598,29.612
VGS: DA4.4 R11.2 | length 2.8
  Top Layer w0.2: R11.2 79.225,32.2 DA4.4
pads on no net: X4.2 X4.3

## Polygon pours and split planes (outlines as drawn)
GND on Top Layer "GND_L01_P002" (solid, pour order 2): 0.006,50.006 100.006,50.006 100.006,0.006 100,0 0,0
NetVT2_D on Top Layer "NETVT2_D_L01_P000" (solid, pour order 0): 55.919,50.006 56,49.925 56,28 70,28 70.013,28.013 70.013,50.006
GND on Bottom Layer "GND_L02_P001" (solid, pour order 1): 0.006,50.006 100.006,50.006 100.006,0.006 0.006,0.006

## Silkscreen, mask and mechanical layers (free items; w line width, h text height)
Bottom Overlay:
  text ".Print_Date" at 21.346,1.154 h1.52
  text "PowerBoard 1.0.0" at 46.746,1.154 h1.52
Board:
  circle w0.013: c95.006,45.006 r1.6
  circle w0.013: c5.006,45.006 r1.6
  circle w0.013: c95.006,5.006 r1.6
  circle w0.013: c5.006,5.006 r1.6
  lines w0.013: 0.006,0.006 100.006,0.006 100.006,50.006 0.006,50.006 0.006,0.006